# Allegro board PROIECT1_CEF.brd
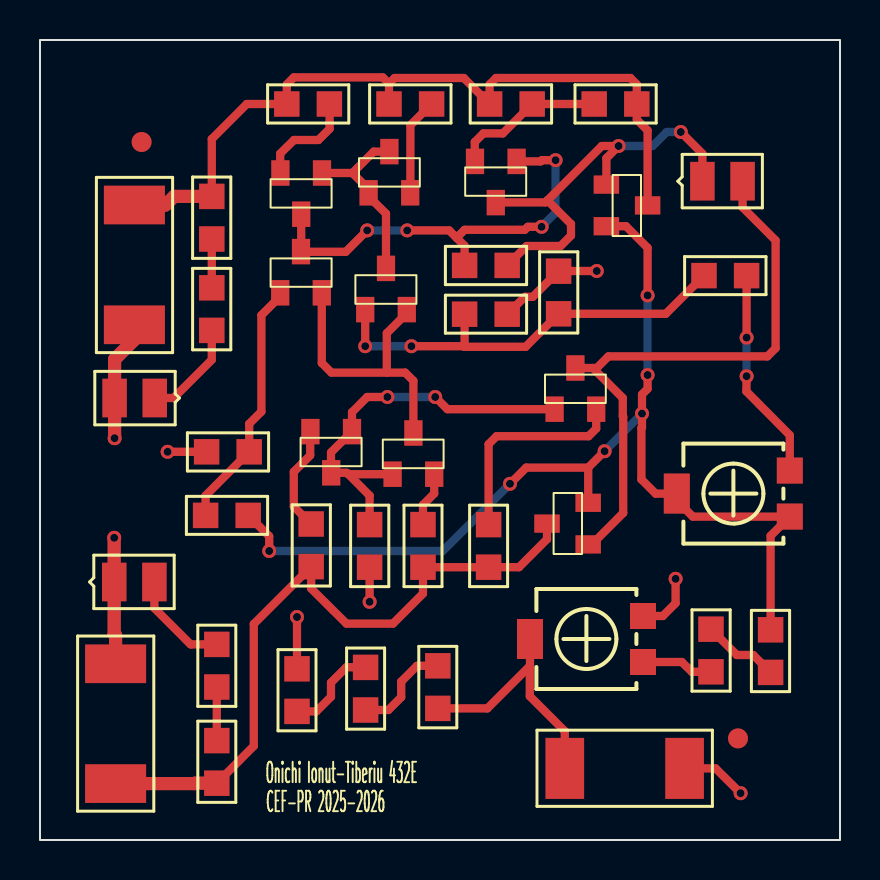
[diagram p0: board, top side]
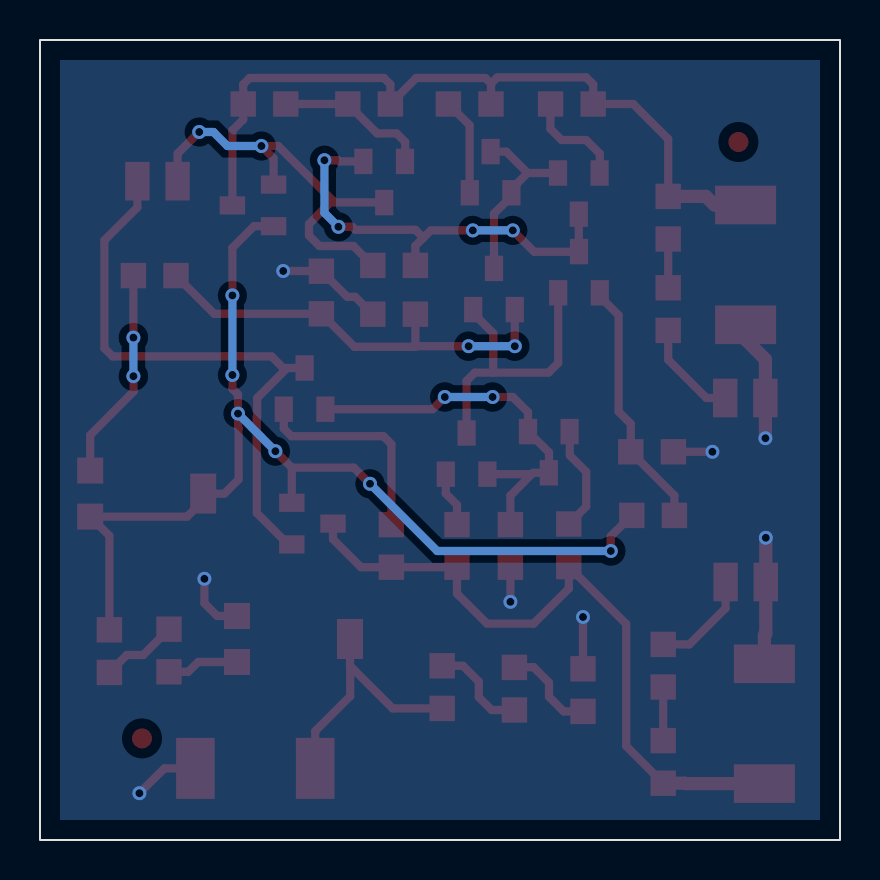
[diagram p1: board, bottom side, seen from below]

Outline 40 x 40 mm; copper layers: TOP, BOTTOM. Coordinates in mm from the lower left corner of the outline.
Outline path: rectangle 0,0 40,40

## Design rules (mm)
nets with their own width: min track width 0.41; nets GND N289507 N289641 N289737 N289751 N289857 N289867 N290133 N290143 N290207 N290213 N290291 N290433 N290519 N290653 N290677 N290683 N299617 N299621 N301532 N302298 N302588 N307015 N314393 N2895630 N2900390 N2900911 N2991600

## Placement (name value [footprint] x y rotation side)
C1  22n  [SMC0805]  21.23 26.29 0 top
C2  33n  [SMC0805]  25.93 26.31 90 top
C3  4.7u  [SMC0805]  22.48 36.8 0 top
C4  4.7p  [SMC0805]  21.23 28.73 0 top
D1  KP-2012  [SMD080512]  5.74 22.1 180 top
D2  KP-2012  [SMD080512]  3.71 12.9 0 top
J1  CON2  [SMR2512]  3.78 8.81 270 top
J2  CON2  [SMR2512]  4.72 25.76 90 top
J3  CON2  [SMR2512]  26.24 3.58 0 top
NOREF  -  []  0 0 0 top
NOREF#2  -  [unnamed#2]  34.9 5.08 0 top
NOREF#3  -  []  40 0 90 top
NOREF#4  -  [unnamed#2]  5.08 34.9 0 top
P1  100  [TS53YL]  37.49 18.47 0 top
P2  10k  [TS53YL]  30.15 11.2 0 top
Q1  QBC856B  [TO236AA]  14.1 33.35 90 top
Q2  QBC856B  [TO236AA]  16.43 32.36 270 top
Q3  QBC846B  [TO236AA]  12.01 27.36 270 top
Q4  QBC846B  [TO236AA]  16.26 26.52 270 top
Q5  QBC846B  [TO236AA]  15.6 20.42 90 top
Q6  QBC846B  [TO236AA]  17.63 18.29 270 top
Q7  QBC846B  [TO236AA]  25.73 21.54 270 top
Q8  QBC856B  [TO236AA]  23.83 33.93 90 top
Q9  QBC846B  [TO236AA]  28.32 32.77 180 top
Q10  QBC856B  [TO236AA]  27.41 14.78 0 top
R1  10k  [SMR0805]  8.33 19.41 0 top
R2  10k  [SMR0805]  8.28 16.23 0 top
R3  100  [SMR0805]  12.34 36.8 0 top
R4  100  [SMR0805]  17.45 36.8 0 top
R5  3.9k  [SMR0805]  16.48 15.77 270 top
R6  51  [SMR0805]  13.56 15.8 270 top
R7  51  [SMR0805]  19.15 15.77 270 top
R8  22  [SMR0805]  22.43 15.77 270 top
R9  100  [SMR0805]  33.2 28.22 0 top
R10  10k  [SMR0805]  36.53 8.38 90 top
R11  5.6k  [SMR0805]  33.55 8.41 90 top
R12  15k  [SMR0805]  19.89 6.58 90 top
R13  2.2k  [SMR0805]  16.28 6.5 90 top
R14  1.8k  [SMR0805]  12.85 6.43 90 top
R15  220  [SMR0805]  8.59 32.18 270 top
R16  220  [SMR0805]  8.59 27.61 270 top
R17  220  [SMR0805]  8.84 2.84 90 top
R18  220  [SMR0805]  8.84 7.65 90 top
R19  51  [SMR0805]  29.84 36.8 180 top
U1  1N4148  [SMD080512]  33.12 32.94 0 top

## Library data of the parts
C1-C4 = C_0
D1 D2 = LED_0
J1-J3 = CON2
P1 P2 = POT
Q1 Q2 Q8 Q10 = QBC856B_0
Q3-Q7 Q9 = QBC846B_0
R1-R19 = R
U1 = 1N4148_1

## Footprints (pads in the part's own frame, mm; a bottom-side part is the same pattern mirrored in y, then rotated)
SMC0805
  rect 1.27x1.27 smd: 1(0,0) 2(2.13,0)
SMD080512
  rect 1.22x1.93 smd: 1(0,0) 2(2.01,0)
SMR0805
  rect 1.27x1.27 smd: 1(0,0) 2(2.13,0)
SMR2512
  rect 1.93x3.05 smd: 1(0,0) 2(5.99,0)
TO236AA
  rect 1.27x0.91 smd: 1(0,0) 2(0,2.08) 3(-2.06,1.04)
TS53YL
  rect 1.3x1.3 smd: 1(0,0) 3(0,-2.3)
  rect 1.3x2 smd: 2(-5.65,-1.15)
unnamed#2
  round 1 smd: (0,0)

## Nets
GND: C1.2 C2.2 D1.2 D2.1 J1.1 J2.1 J3.2 P2.1 R1.1 R5.2 R14.2
N289507: C3.1 J2.2 Q9.3 R3.1 R4.1 R15.1 R19.1
N289641: Q1.2(E) R3.2
N289737: Q1.1 Q2.1 Q2.3 Q4.3
N289751: C4.1 Q1.3 Q3.3 Q8.1
N289857: P1.2(T) P1.3 Q9.2(E) Q10.2(E) R2.2 R10.2
N289867: C4.2 Q8.3 Q9.1 U1.1
N290133: Q3.1 R1.2 R2.1
N290143: C1.1 C2.1 Q4.1 R9.1
N290207: P2.3 R11.1
N290213: Q3.2(E) Q4.2(E) Q6.3
N290291: J3.1 P2.2(T) R12.1
N290433: Q7.3 Q10.1 U1.2
N290519: J1.2 Q10.3 R6.2 R7.2 R8.2 R17.1
N290653: Q5.1 Q5.3 Q6.1 Q7.1 R5.1
N290677: Q6.2(E) R7.1
N290683: Q7.2(E) R8.1
N299617: R13.2 R14.1
N299621: R12.2 R13.1
N301532: C3.2 Q8.2(E) R19.2
N302298: Q5.2(E) R6.1
N302588: D2.2 R18.2
N307015: Q2.2(E) R4.2
N314393: D1.1 R16.2
N2895630: R15.2 R16.1
N2900390: P1.1 R9.2
N2900911: R10.1 R11.2
N2991600: R17.2 R18.1

## Via types
v1: diameter 0.7, hole 0.4, TOP to BOTTOM, 26 vias

## Routing (per net, layer and track width the routed paths; a pad name or vN(x,y) marks a point on that pad's centre or on a via; arc(x,y) is an arc through that point)
GND: length 30.5
  TOP w0.41: R14.2 v1(12.85,11.15) ; P2.1 31.14,11.2 31.78,11.84 v1(31.78,13.06) ; 25.93,28.45 C2.2 25.93,28.45 ; 25.93,28.45 24.64,27.16 24.24,27.16 23.37,26.29 C1.2 ; 25.93,28.45 v1(27.84,28.45) ; J3.2 33.78,3.58 v1(35.03,2.34) ; R5.2 v1(16.48,11.91) ; R1.1 v1(6.38,19.41)
  TOP w0.66: J1.1 3.78,10.24 3.71,10.31 D2.1 v1(3.71,15.11) ; v1(3.73,20.09) D1.2 3.73,24.03 4.72,25.02 J2.1
N289507: length 39.3
  TOP w0.41: 17.45,37.82 17.73,38.1 21.19,38.1 C3.1 22.48,37.78 22.8,38.1 29.52,38.1 29.84,37.78 R19.1 29.84,36.02 30.38,35.48 Q9.3 ; 17.45,37.82 R4.1 ; 17.45,37.82 17.14,38.13 12.69,38.13 12.34,37.78 R3.1 10.34,36.8 8.59,35.05 R15.1
  TOP w0.66: J2.2 6.27,31.75 6.71,32.18 R15.1
N289641: length 5.2
  TOP w0.41: Q1.2 12.01,33.35 12.01,34.32 12.7,35 13.92,35 14.48,35.56 14.48,36.8 R3.2
N289737: length 9.3
  TOP w0.41: 15.62,33.35 16.43,32.54 Q2.1 16.43,32.18 17.3,31.32 Q4.3 ; 15.62,33.35 16.69,34.42 Q2.3 ; 15.62,33.35 Q1.1
N289751: length 21.9
  TOP w0.41: 13.06,29.41 15.29,29.41 v1(16.36,30.48) ; 13.06,29.41 Q3.3 13.06,29.41 ; 13.06,29.41 Q1.3 ; Q8.1 25.03,33.93 25.09,33.99 v1(25.78,33.99) ; 20.83,30.11 20.46,30.48 v1(18.36,30.48) ; 20.83,30.11 21.23,29.71 C4.1 ; 20.83,30.11 21.23,30.51 24.24,30.51 24.39,30.66 v1(25.08,30.66)
  BOTTOM w0.41: v1(25.78,33.99) 25.78,31.36 v1(25.08,30.66) ; v1(18.36,30.48) v1(16.36,30.48)
N289857: length 54.1
  TOP w0.41: v1(11.46,14.45) 11.46,15.19 R2.2 ; 27.41,18.62 24.31,18.62 v1(23.5,17.81) ; 27.41,18.62 v1(28.23,19.44) ; 27.41,18.62 Q10.2 ; R10.2 36.53,15.21 P1.3 32.64,16.17 31.84,16.97 P1.2 30.78,17.32 30.07,18.03 30.07,20.6 30.1,20.63 v1(30.1,21.32) 30.1,22.28 30.38,22.56 v1(30.38,23.25) ; v1(30.38,27.23) 30.38,29.61 29.3,30.69 Q9.2
  BOTTOM w0.41: v1(30.38,27.23) v1(30.38,23.25) ; v1(30.1,21.32) v1(28.23,19.44) ; v1(11.46,14.45) 20.14,14.45 v1(23.5,17.81)
N289867: length 21.9
  TOP w0.41: Q9.1 28.32,34.09 v1(28.93,34.7) 28.09,34.7 25.37,31.98 ; 25.37,31.98 26.55,30.8 26.55,30.22 26.03,29.7 24.33,29.7 C4.2 ; 25.37,31.98 25.27,31.88 22.78,31.88 Q8.3 ; U1.1 33.12,34.32 v1(32.04,35.4)
  BOTTOM w0.41: v1(28.93,34.7) 30.63,34.7 31.33,35.4 v1(32.04,35.4)
N290133: length 12.7
  TOP w0.41: Q3.1 12.01,27.18 11.07,26.24 11.07,21.42 10.46,20.81 R1.2 8.28,17.22 R2.1
N290143: length 21.9
  TOP w0.41: 21.23,24.66 24.28,24.66 C2.1 31.29,26.31 R9.1 ; 21.23,24.66 21.2,24.69 v1(18.57,24.69) ; 21.23,24.66 C1.1 ; v1(16.26,24.69) Q4.1
  BOTTOM w0.41: v1(16.26,24.69) v1(18.57,24.69)
N290207: length 3.6
  TOP w0.41: P2.3 32.09,8.9 32.59,8.41 R11.1
N290213: length 14.8
  TOP w0.41: 17.34,23.37 18.26,23.37 18.67,22.96 Q6.3 ; 17.34,23.37 14.57,23.37 14.09,23.85 Q3.2 14.1,27.36 14.1,27.53 ; 17.34,23.37 17.34,25.34 18.34,26.34 Q4.2
N290291: length 12.7
  TOP w0.41: P2.2 24.5,8.72 ; 24.5,8.72 24.5,8.71 22.37,6.58 R12.1 ; 24.5,8.72 24.49,8.71 24.49,7.19 26.24,5.44 J3.1
N290433: length 29.7
  TOP w0.41: 27.64,23.6 29.14,22.1 29.14,21.19 29.16,21.17 29.16,16.35 27.59,14.78 Q10.1 ; 27.64,23.6 Q7.3 ; 27.64,23.6 27.84,23.6 28.42,24.18 36.37,24.18 36.78,24.59 36.78,29.98 35.13,31.63 U1.2
N290519: length 34.8
  TOP w0.41: Q10.3 25.35,15.04 23.95,13.64 R8.2 R7.2 19.15,12.32 17.65,10.82 15.32,10.82 13.56,12.57 R6.2 10.69,10.8 10.69,4.7 R17.1
  TOP w0.66: J1.2 7.72,2.82 7.75,2.84 R17.1
N290653: length 20.2
  TOP w0.41: v1(19.76,22.15) 20.37,21.54 Q7.1 ; Q6.1 15.42,18.29 ; 15.42,18.29 15.34,18.36 Q5.3 14.55,18.36 14.55,19.38 Q5.1 15.6,21.39 16.36,22.15 v1(17.37,22.15) ; 15.42,18.29 16.48,17.22 R5.1
  BOTTOM w0.41: v1(19.76,22.15) v1(17.37,22.15)
N290677: length 2.8
  TOP w0.41: R7.1 19.15,16.76 19.71,17.32 Q6.2
N290683: length 10.7
  TOP w0.41: Q7.2 27.81,20.57 27.43,20.19 22.83,20.19 22.43,19.79 R8.1
N299617: length 4.8
  TOP w0.41: R13.2 16.28,8.64 15.32,8.64 14.55,7.87 14.55,7.16 13.82,6.43 R14.1
N299621: length 5
  TOP w0.41: R12.2 18.85,8.71 18.06,7.92 18.06,7.14 17.42,6.5 R13.1
N301532: length 7.7
  TOP w0.41: Q8.2 21.74,33.93 21.74,34.9 22.17,35.33 23.14,35.33 C3.2 R19.2
N302298: length 5.3
  TOP w0.41: R6.1 12.69,16.67 12.69,18.41 13.51,19.23 13.51,20.42 Q5.2
N302588: length 5.2
  TOP w0.41: D2.2 5.72,11.59 7.53,9.78 R18.2
N307015: length 4.9
  TOP w0.41: Q2.2 18.52,32.36 18.52,35.74 R4.2
N314393: length 5.1
  TOP w0.41: R16.2 8.59,24.01 6.68,22.1 D1.1
N2895630: length 2.4
  TOP w0.41: R16.1 R15.2
N2900390: length 10.6
  TOP w0.41: R9.2 v1(35.33,25.12) ; v1(35.33,23.19) 35.32,22.43 37.49,20.24 P1.1
  BOTTOM w0.41: v1(35.33,25.12) v1(35.33,23.19)
N2900911: length 3.9
  TOP w0.41: R11.2 34.84,9.25 35.66,9.25 R10.1
N2991600: length 2.7
  TOP w0.41: R17.2 R18.1

## Copper pours and planes (outline as drawn; the poured copper is in the pictures)
GND on BOTTOM: 1,1 1,39 39,39 39,1

## Text on the board
Ref Des/Silkscreen Top: Onichi Ionut-Tiberiu 432E | CEF-PR 2025-2026
MECANIC: *  SURFACE - AIR 0 MM | L1 TOP CONDUCTOR - COPPER 0.018 MM | *  DIELECTRIC - FR-4 1.564 MM | L2 BOTTOM CONDUCTOR - COPPER 0.018 MM | DESIGN CROSS SECTION CHART | ___________________________ | TOTAL THICKNESS 1.6 MM | 1-2 | FIGURE | FINISHED_SIZE | 0.4 | DRILL CHART: TOP to BOTTOM | ALL UNITS ARE IN MILLIMETERS | PLATED | QTY | 26
